# EAGLE board timetracker-1-4 (EAGLE 7.5.0)
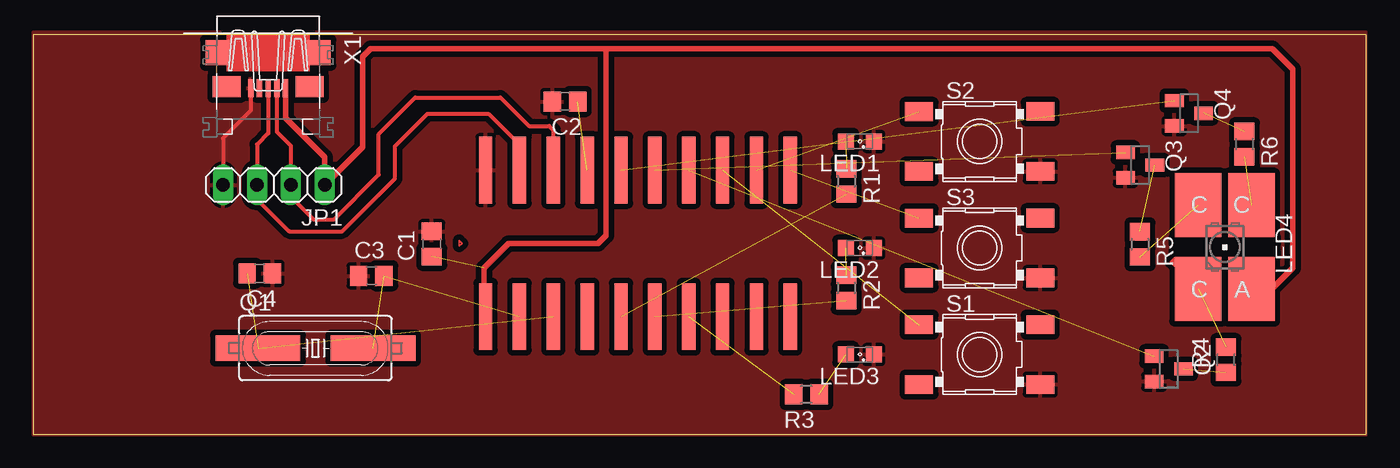
[diagram p0: board, top side]

Size 100 x 30 mm. Coordinates in mm from the lower left corner, seen from the top.
Outline: 0,0 100,0 100,30 0,30 0,0
Copper layers (1*16): Top 0.035mm / dielectric 1.5mm / Bottom 0.035mm
Design rules "default *": minimum track width 10mil, minimum drill 24mil, track to track 12mil, track to pad 12mil, pad to pad 8mil, via to via 8mil, smd to smd 8mil, copper to edge 0mil, drill to drill 8mil, minimum pad ring 10mil, minimum via ring 8mil, stop-mask expansion 4mil, vias tented up to drill 0mil, thermal gap 10mil
Net classes: 0 default: width 0.305 mm

## Footprints (pad centres in the part's own frame; a part is rotated, then mirrored left to right if it is on the bottom)
C0805 = smd 1.3 x 1.5: 1 -0.95,0; 2 0.95,0
1X04 = drill 1.016 long: 1 -3.81,0; 2 -1.27,0; 3 1.27,0; 4 3.81,0
SML0805 = smd 1.2 x 1.2: A 1.05,0; C -1.05,0
P-LCC-4 = smd 3.5 x 4.8: A -2,3.15; C@1 2,3.15; C@3 -2,-3.15; C@4 2,-3.15
HC49UP = smd 6.35 x 1.93: 1 -4.318,0; 2 4.318,0
SOT23 = smd 1 x 1.4: 1 -0.95,-1.1; 2 0.95,-1.1; 3 0,1.1
R0805 = smd 1.3 x 1.5: 1 -0.95,0; 2 0.95,0
TACTSW-6X6 = smd 2.1 x 1.4: 1 -4.55,2.24; 2 4.55,2.25; 3 -4.55,-2.25; 4 4.55,-2.25
DIL20-SMD = smd 1 x 5: 1 -11.43,-5.5; 2 -8.89,-5.5; 3 -6.35,-5.5; 4 -3.81,-5.5; 5 -1.27,-5.5; 6 1.27,-5.5; 7 3.81,-5.5; 8 6.35,-5.5; 9 8.89,-5.5; 10 11.43,-5.5; 11 11.43,5.5; 12 8.89,5.5; 13 6.35,5.5; 14 3.81,5.5; 15 1.27,5.5; 16 -1.27,5.5; 17 -3.81,5.5; 18 -6.35,5.5; 19 -8.89,5.5; 20 -11.43,5.5
MICRO-B-PAC = smd 1.35 x 0.4: 1 2.675,1.3; 2 2.675,0.65; 3 2.675,0; 4 2.675,-0.65; 5 2.675,-1.3 | smd 1.9 x 1.8: M1 0,-3.8; M2 0,3.8 | smd 1.6 x 2.1: M3 2.55,3.1; M4 2.55,-3.1

## Placement (x,y rotation side)
C1  1 uF  [C0805]  29.9,14.3 90 top
C2  470 nF  [C0805]  39.9,25 180 top
C3  18 pF  [C0805]  25.36,11.91 0 top
C4  18 pF  [C0805]  16.99,12.09 180 top
JP1  [1X04]  18.05,18.74 180 top
LED1  [SML0805]  62,22 180 top
LED2  [SML0805]  62,14 180 top
LED3  [SML0805]  62,6 180 top
LED4  [P-LCC-4]  89.39,14.06 180 top
Q1  [HC49UP]  21.17,6.48 0 top
Q2  BSS123  [SOT23]  85.19,4.92 270 top
Q3  BSS123  [SOT23]  83.04,20.22 270 top
Q4  BSS123  [SOT23]  86.7,24.12 270 top
R1  [R0805]  61,19 270 top
R2  [R0805]  61,11 270 top
R3  [R0805]  58,3 180 top
R4  [R0805]  89.48,5.61 90 top
R5  [R0805]  83.02,14.28 270 top
R6  [R0805]  90.86,21.8 270 top
S1  TACTSW-6X6S  [TACTSW-6X6]  71,6 0 top
S2  TACTSW-6X6S  [TACTSW-6X6]  71,22 0 top
S3  TACTSW-6X6S  [TACTSW-6X6]  71,14 0 top
U$1  PIC18F14K50SMD  [DIL20-SMD]  45.36,14.35 0 top
X1  MICRO-USB-B  [MICRO-B-PAC]  17.62,28.67 270 top

## Library data of the parts
C1-C4 R1-R6 = rcl
JP1 = pinhead
LED1-LED3 = led
LED4 S1-S3 X1 = g-e2e-training
Q1 = g-e2e-training; OC_FARNELL: unknown; OC_NEWARK: unknown
Q2-Q4 = transistor-small-signal
U$1 = pic18f14k50

## Nets
+5V: C1.1 JP1.1 LED4.A U$1.1 X1.1
GND: C1.2 C2.2 C3.1 C4.1 JP1.4 LED1.C LED2.C LED3.C Q2.2 Q3.2 Q4.2 S1.4 S2.4 S3.4 U$1.20 X1.5
N$1: JP1.3 U$1.19 X1.3
N$2: C3.2 Q1.2 U$1.2
N$3: C2.1 U$1.17
N$4: C4.2 Q1.1 U$1.3
N$5: JP1.2 U$1.18 X1.2
N$6: R3.2 U$1.7
N$7: R2.2 U$1.6
N$8: R1.2 U$1.5
N$9: LED1.A R1.1
N$10: LED2.A R2.1
N$11: LED3.A R3.1
N$12: LED4.C@1 R4.2
N$13: LED4.C@4 R5.2
N$14: S1.1 U$1.13
N$15: S2.1 U$1.12
N$16: LED4.C@3 R6.2
N$17: Q2.3 R4.1
N$18: Q3.3 R5.1
N$19: Q4.3 R6.1
N$20: Q4.1 U$1.16
N$21: Q3.1 U$1.15
N$22: Q2.1 U$1.14
N$23: S3.1 U$1.11

## Tracks (layer width: path | path; a pad name or v marks a point on that pad's centre or on a via)
+5V  (1 unrouted)
  Top 0.406: X1.1 18.92,23.75 21.86,20.81 JP1.1 24.69,21.57 24.69,28.35 25.3,28.96 42.98,28.96 | 42.98,28.96 92.96,28.96 94.49,27.43 94.49,12.5 92.9,10.91 LED4.A | U$1.1 33.83,8.95 33.83,12.5 35.66,14.33 42.37,14.33 42.98,14.94 42.98,28.96
GND
  Top 0.305: X1.5 16.32,24.32 14.24,22.24 JP1.4
  pour Top (isolate 0.406): 0,29.87 0,0 99.97,0 99.97,30.18 0,30.18
N$1
  Top 0.305: X1.3 17.62,22.62 16.78,21.78 JP1.3 16.76,18.72 16.76,17.68 19.2,15.24 23.16,15.24 27.13,19.2 27.13,21.64 29.57,24.08 34.14,24.08 36.47,21.75 U$1.19
N$2  (2 unrouted)
N$3  (1 unrouted)
N$4  (2 unrouted)
N$5
  Top 0.305: X1.2 18.27,22.73 19.32,21.68 JP1.2 19.32,17.87 21.03,16.15 22.55,16.15 25.91,19.51 25.91,22.55 28.65,25.3 35.05,25.3 37.19,23.16 38.71,23.16 39.01,22.86 U$1.18
N$6  (1 unrouted)
N$7  (1 unrouted)
N$8  (1 unrouted)
N$9  (1 unrouted)
N$10  (1 unrouted)
N$11  (1 unrouted)
N$12  (1 unrouted)
N$13  (1 unrouted)
N$14  (1 unrouted)
N$15  (1 unrouted)
N$16  (1 unrouted)
N$17  (1 unrouted)
N$18  (1 unrouted)
N$19  (1 unrouted)
N$20  (1 unrouted)
N$21  (1 unrouted)
N$22  (1 unrouted)
N$23  (1 unrouted)